# Altium PCB Encoder Unit.PcbDoc
Units mm, origin at the board's own origin, x right, y up, seen from the top; angles counter-clockwise.
Board outline 34 x 27 mm, 2 copper layers (Top Layer, Bottom Layer); 16 components, 10 nets, 43 pads, 9 vias.
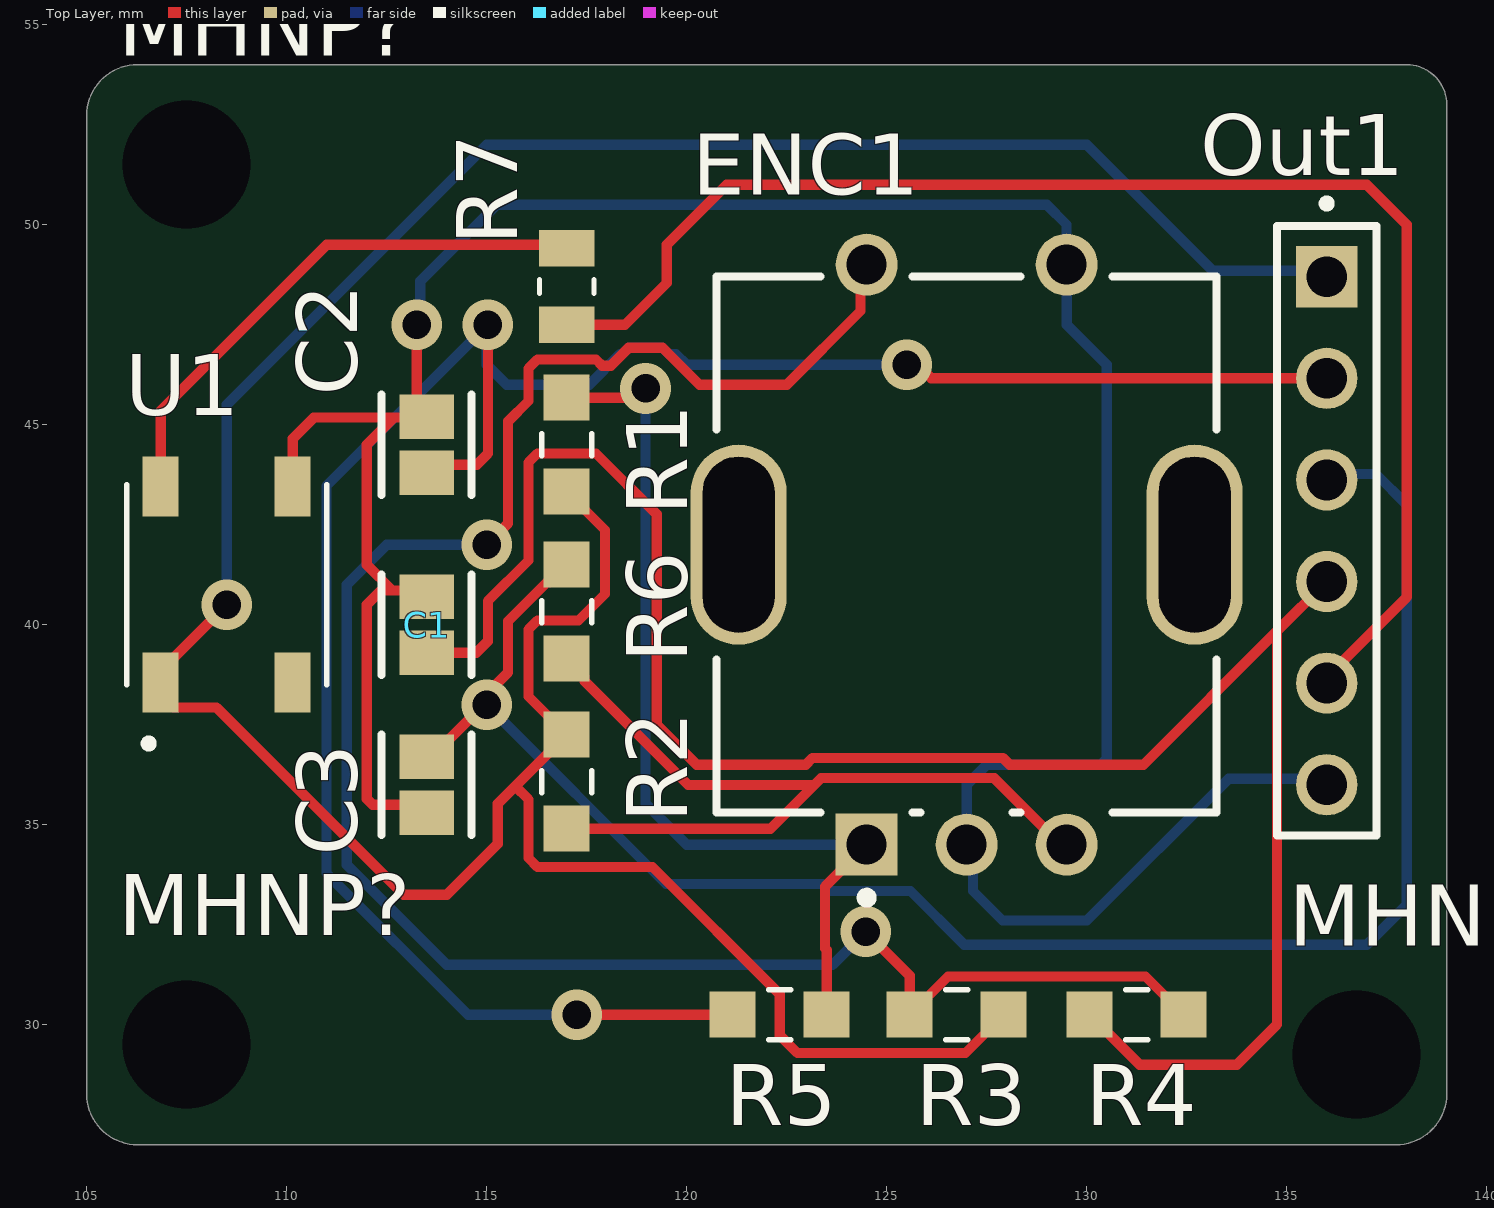
[diagram p0: Top Layer view]
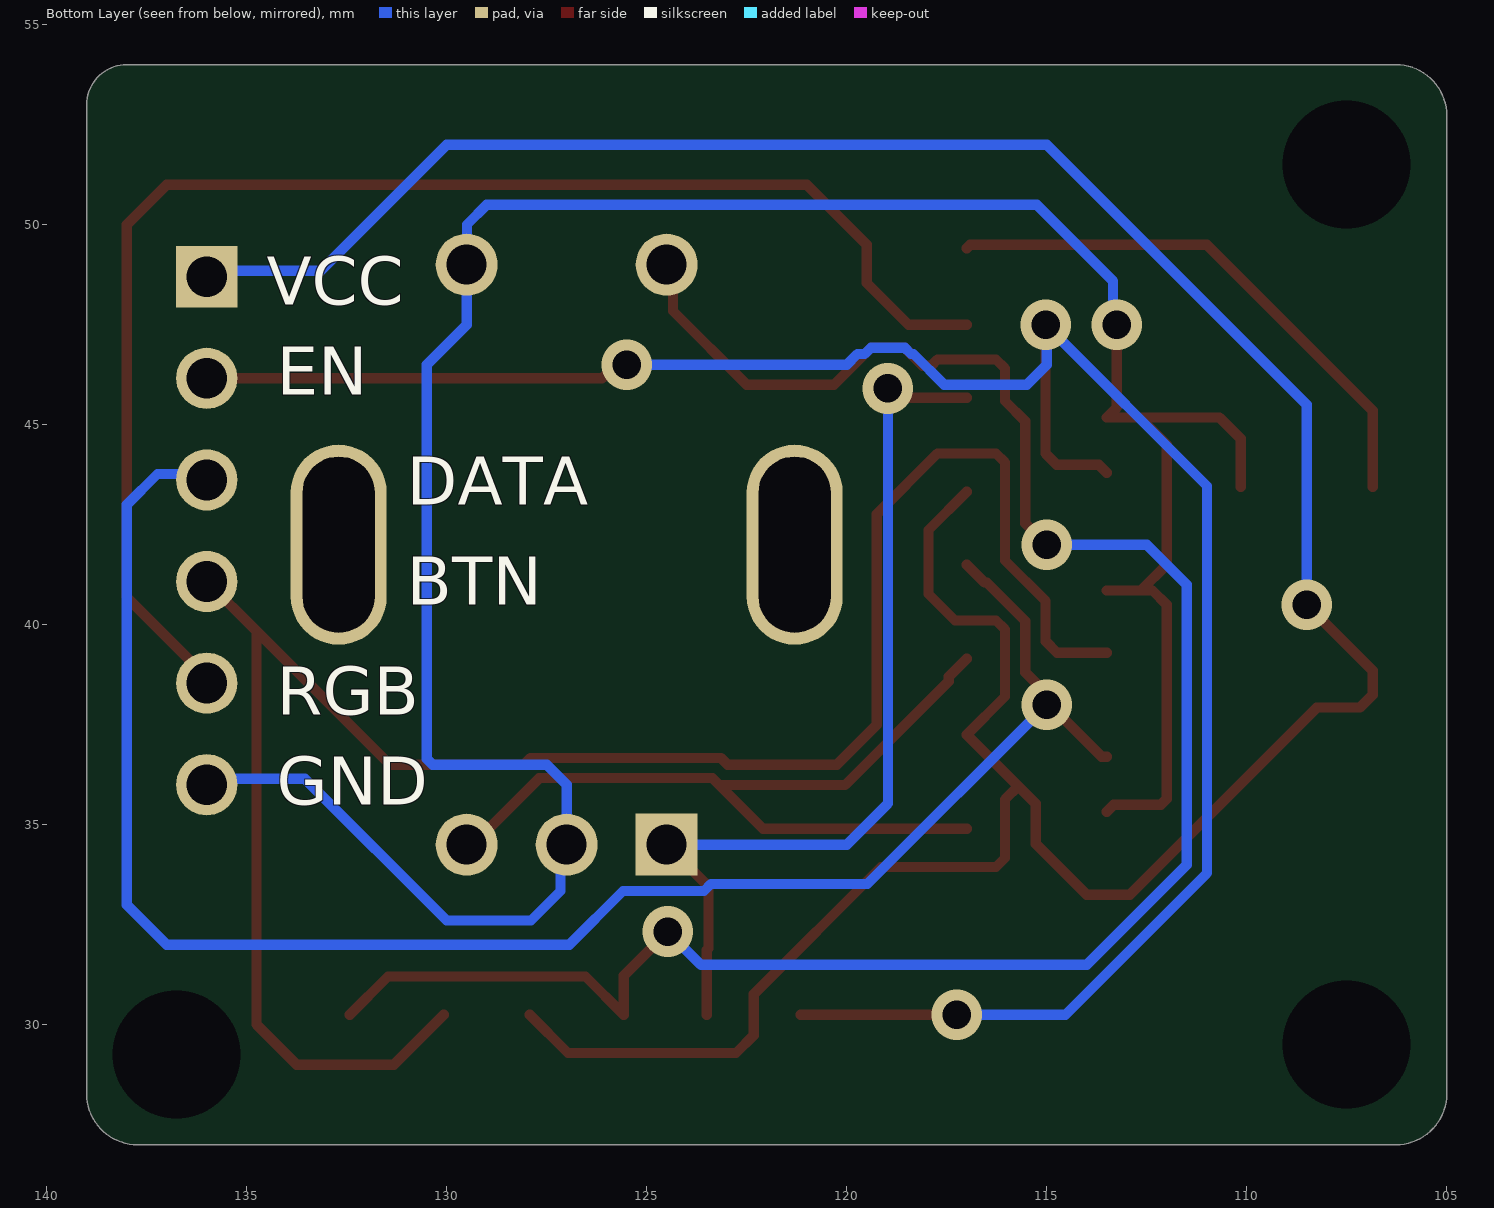
[diagram p1: Bottom Layer view, seen from below]
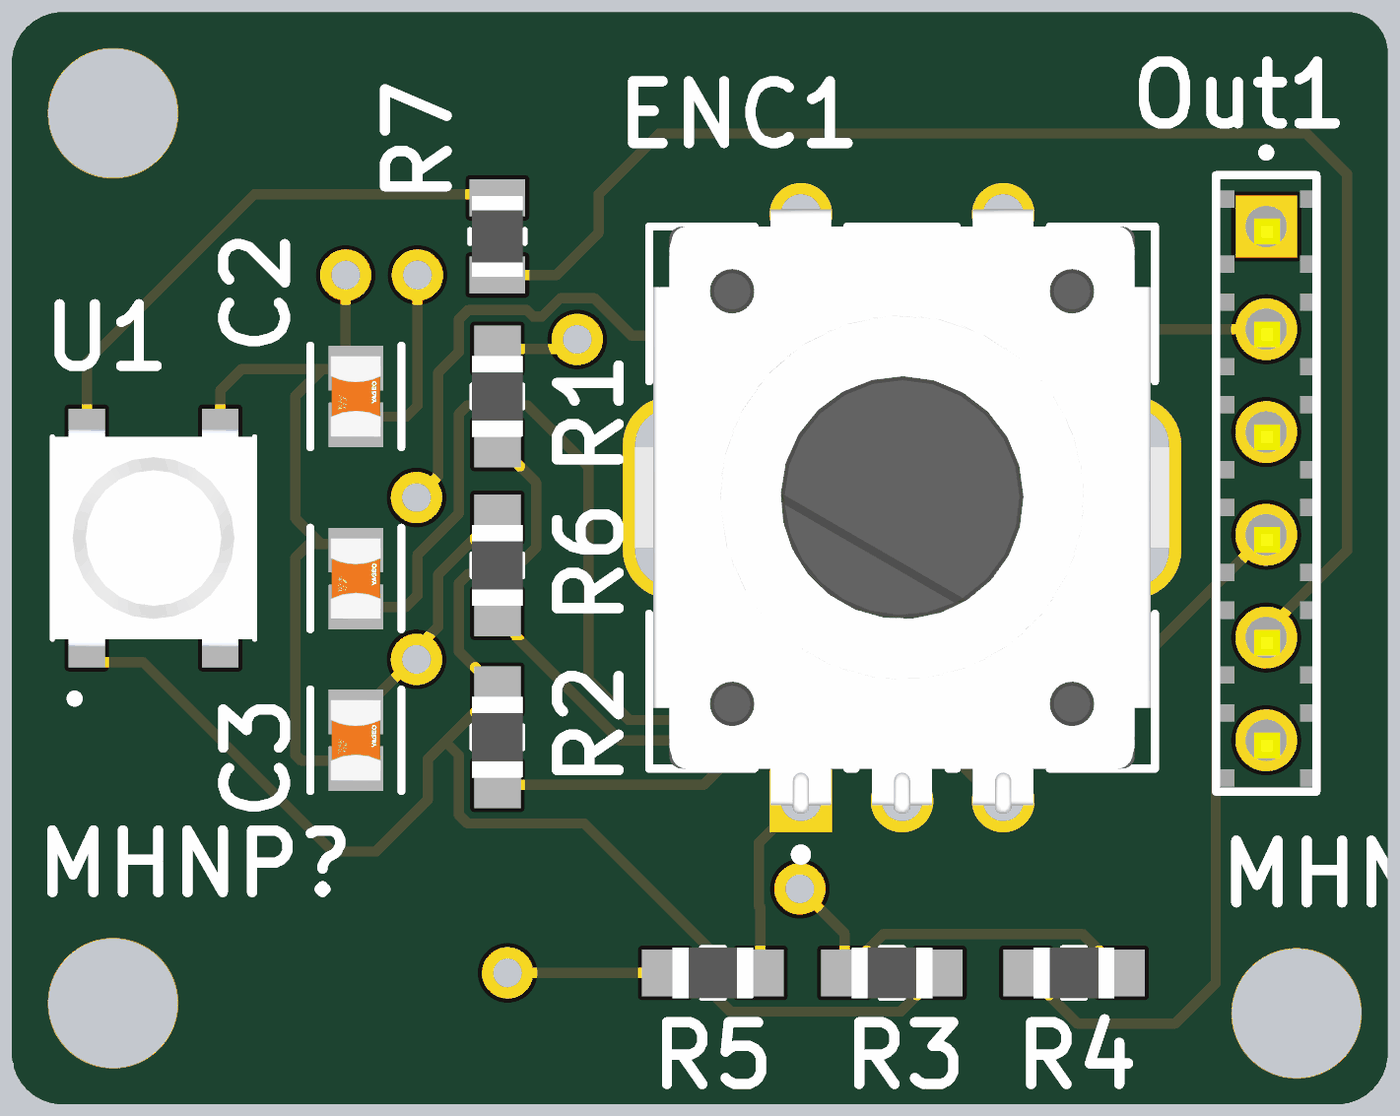
[diagram p2: 3D render of the assembled board from above, using the file's embedded part models]

## Layer stack, top to bottom
Top Solder: solder mask 0.0102, Solder Resist, Dk 3.5
Top Layer: signal copper 0.0356
Dielectric 1: dielectric 0.32, FR-4, Dk 4.8
Bottom Layer: signal copper 0.0356
Bottom Solder: solder mask 0.0102, Solder Resist, Dk 3.5

## Board outline
105,28.27 ccw(c106.27,28.27) 106.27,27 137.73,27 ccw(c137.73,28.27) 139,28.27 139,53 ccw(c138,53) 138,54 106.27,54 ccw(c106.27,52.73) 105,52.73

## Design rules (kind name [scope] priority, off if disabled: settings)
Clearance [All] p1: gap=0.254 ignorepadtopadclearanceinfootprint=FALSE
HoleSize [All] p1: absolutevalues=TRUE maxlimit=5 minlimit=0.025 maxpercent=80.000 minpercent=20.000
PolygonConnect [All] p1: connectstyle=Relief reliefconductorwidth=0.254 reliefentries=4 polygonreliefangle="90 Angle" airgapwidth=0.254
RoutingVias [All] p1: holewidth=0.711 width=1.27 viastyle="Through Hole" minholewidth=0.711 minwidth=1.27 maxholewidth=0.711 maxwidth=1.27
SolderMaskExpansion [All] p1: expansion=0.102 istentingtop=FALSE
SupplyNets "Schematic Supply Nets_1" [InNet('VCC')] p1: voltage=0.000
SupplyNets "Schematic Supply Nets" [InNet('GND')] p2: voltage=0.000
Width [All] p1: maxlimit=0.3 minlimit=0.254 preferedwidth=0.3
29 further rules are at their usual default settings.

## Components (designator, comment, footprint, x,y, rotation, side; value= is the part's Value field where it differs from the comment)
C1 "CC0805KRX7R9BB104" FP-CC0805-0_85-IPC_C 113.5,40 r90 top value="100 nF"
C2 "CC0805KRX7R9BB104" FP-CC0805-0_85-IPC_C 113.5,44.5 r90 top value="100 nF"
C3 "CC0805KRX7R9BB104" FP-CC0805-0_85-IPC_C 113.5,36 r90 top value="100 nF"
ENC1 "PEC11R-4215F-S0024" FP-PEC11R-4215F-S0024-MFG 127,42 r0 top
MHNP? "Mounting Hole Non plated 3.2mm" MTHNP3P2MM 107.5,51.5 r90 top
MHNP? "Mounting Hole Non plated 3.2mm" MTHNP3P2MM 107.5,29.5 r90 top
MHNP? "Mounting Hole Non plated 3.2mm" MTHNP3P2MM 136.75,29.25 r90 top
Out1 "HMTSW-106-X-X-S-X" SAMTEC_HMTSW-106-X-X-S-X 136,42.35 r90 top
R1 "ERJ6RBD1002V" RES_ERJ6RBD1002V 117,44.5 r270 top
R2 "ERJ6RBD1002V" RES_ERJ6RBD1002V 117,36.075 r90 top
R3 "ERJ6RBD1002V" RES_ERJ6RBD1002V 126.75,30.25 r0 top
R4 "ERJ6RBD1001V" RES_ERJ6RBD1001V 131.25,30.25 r0 top
R5 "ERJ6RBD1001V" RES_ERJ6RBD1001V 122.325,30.25 r180 top
R6 "ERJ6RBD1001V" RES_ERJ6RBD1001V 117,40.325 r90 top
R7 "RC0805FR-07220RL" RESC2012X60N 117,48.455 r90 top
U1 "WS2812B-B" LED_WS2812B-B 108.5,41 r90 top

## Footprints (in the part's own frame and the unit in brackets; to place one, negate y for a bottom-side part, rotate by r counter-clockwise, add the part's x,y. Pads: shape width x height; smd on the part's side, far side on the other; paste and mask are expansions set on the pad)
FP-CC0805-0_85-IPC_C [mm]
  rect 1.105x1.356 smd paste+0 mask+0: 1(-0.701,0) 2(0.701,0)
  silkscreen extent -1.25,-1.12 1.25,1.12, body extent -1.35,-0.82 1.35,0.82, height 0.25
FP-PEC11R-4215F-S0024-MFG [mm]
  round 1.55 hole 1 paste-2539.97 mask+0: 1(-2.5,7) 2(2.5,7) B(2.5,-7.5) C(0,-7.5)
  rrect100% 2.4x5 hole 4.4 slot 1.8 at 0 deg paste-2539.97 mask+0: 3(-5.7,0) 4(5.7,0)
  rect 1.55x1.55 hole 1 paste-2539.97 mask+0: A(-2.5,-7.5)
  silkscreen extent -6.25,-8.95 6.25,6.7, body extent -7,-8.37 7,7.88, height 0.25
LED_WS2812B-B [mm]
  rect 1.5x0.9 smd: 1(-2.45,1.65) 2(-2.45,-1.65) 3(2.45,-1.65) 4(2.45,1.65)
  silkscreen extent -4.07,-2.5 2.5,2.5, body extent -2.7,-2.5 2.7,2.5, height 1.62
MTHNP3P2MM [mm] "Mounting Hole Non plated 3.2mm"
  round 1 hole 3.2: ""(0,0)
RES_ERJ6RBD1001V [mm]
  rect 1.15x1.15 smd: 1(-1.175,0) 2(1.175,0)
  silkscreen extent -0.28,-0.63 0.28,0.63, body extent -1,-0.63 1,0.63, height 0.7
RES_ERJ6RBD1002V [mm]
  rect 1.15x1.15 smd: 1(-1.175,0) 2(1.175,0)
  silkscreen extent -0.28,-0.63 0.28,0.63, body extent -1,-0.63 1,0.63, height 0.7
RESC2012X60N [mm]
  rect 0.92x1.38 smd: 1(-0.955,0) 2(0.955,0)
  silkscreen extent -0.17,-0.68 0.17,0.68, body extent -1,-0.63 1,0.63, height 0.6
SAMTEC_HMTSW-106-X-X-S-X [mm]
  rect 1.53x1.53 / inner round 1.53 / far side rect 1.53x1.53 hole 1.02: 01(6.35,0)
  round 1.53 hole 1.02: 02(3.81,0) 03(1.27,0) 04(-1.27,0) 05(-3.81,0) 06(-6.35,0)
  silkscreen extent -7.62,-1.24 8.28,1.24, body extent -7.75,-1.27 7.49,1.22, height 2.54

## Part data
C1 C2 C3: library part CMP-2100-03606-3, "CAP CER 0.1UF 50V X7R 0805", Capacitance="100 nF", Manufacturer=Yageo, Package=CC0805-0.85, Temperature="-30°C to +85°C", Temperature Characteristic=X7R, Temperature Range High=+85°C, Temperature Range Low=-30°C, Tolerance=0.1, Voltage Rating="50 V", Automotive=No, Category=Cap, ComponentLink2Description=Datasheet, ComponentLink2URL=http://www.yageo.com/documents/recent/UPY-GPHC_Y5V_6.3V-to-50V_8.pdf, Device Class L1="Passive Components", Device Class L2=Capacitors, Device Class L3="Ceramic Capacitors", Digikey Description="CAP CER 0.1UF 50V X7R 0805", Footprint Url=http://www.yageo.com/exep/pages/download/literatures/UPY-C_GEN_24.pdf, Height=0.95mm, Ipc Land Pattern Name=CAPC200125X85, Lead Free=Yes, Manufacturer Part Number=CC0805KRX7R9BB104, Material=Ceramic, Mouser Description="Multilayer Ceramic Capacitors MLCC - SMD/SMT 100nF 50V X7R 10%", Octopart=https://octopart.com/cc0805krx7r9bb104-yageo-192993, RoHS=TRUE
ENC1: library part CMP-1747-00012-2, "ROTARY ENCODER MECHANICAL 24PPR", LCSC Part Number=C143790, Max Operating Temperature=70°C, Min Operating Temperature=-30°C, Package Quantity=150, Built in Switch=Yes, Detent=Yes, Encoder Type=Mechanical, Height=13.4mm, Hole Diameter=1.8mm, Length=21.5mm, Mount="Through Hole", Number of Channels=2, Orientation=Vertical, Output Type=Quadrature, Packaging=Bulk, Pulses per Revolution=24, Radiation Hardening=No, REACH SVHC="No SVHC", RoHS Compliant=Yes, Series=PEC11R, Termination="PC Pins", Type=Mechanical, Width=12.5mm
MHNP? MHNP? MHNP?: library part MTHNP3P2MM
Out1: ".100 High-Temp Variable Post Height Terminal Strip", LCSC Part Number=C3334125, Package=None, Check_prices=https://www.snapeda.com/parts/HMTSW-106-07-T-S-200/Samtec/view-part/?ref=eda, MF=SAMTEC, MP=HMTSW-106-07-T-S-200, SnapEDA_Link=https://www.snapeda.com/parts/HMTSW-106-07-T-S-200/Samtec/view-part/?ref=snap
R1 R2 R3: "Precision Thick Film Surface Mnt Resistor 0805 10kOhm +/-0.5% 0.1W +/-50ppm/degC", Package="805-2 Panasonic", Check_prices=https://www.snapeda.com/parts/ERJ6RBD1002V/Panasonic/view-part/?ref=eda, MF=Panasonic, MP=ERJ6RBD1002V, SnapEDA_Link=https://www.snapeda.com/parts/ERJ6RBD1002V/Panasonic/view-part/?ref=snap
R4 R5 R6: "Precision Thick Film Surface Mnt Resistor 0805 1kOhm +/-0.5% 0.1W +/-50ppm/degC", Package="805-2 Panasonic", Check_prices=https://www.snapeda.com/parts/ERJ6RBD1001V/Panasonic/view-part/?ref=eda, MF=Panasonic, MP=ERJ6RBD1001V, SnapEDA_Link=https://www.snapeda.com/parts/ERJ6RBD1001V/Panasonic/view-part/?ref=snap
R7: "220 Ohm Â±1% 0,125W, 1/8W Ã‡ip Direnci 0805 (2012 Metrik) Nem DirenÃ§li KalÄ±n Film", Package="2012 Yageo", Check_prices=https://www.snapeda.com/parts/RC0805FR-07220RL/Yageo/view-part/?ref=eda, MF=Yageo, MP=RC0805FR-07220RL, SnapEDA_Link=https://www.snapeda.com/parts/RC0805FR-07220RL/Yageo/view-part/?ref=snap
U1: "Intelligent control LED integrated light source", LCSC Part Number=C114586, Package=None, Availability=Unavailable, MP=WS2812B-B, Price=None

## Free pads (board coordinates)
  round 3.2 on Mech1: 2(107.5,29.5) 3(107.5,51.5) 4(136.75,29.25)

## Via types
v1: diameter 1.27, hole 0.711, Top Layer to Bottom Layer, 9 vias

## Nets (pads, with @x,y where several pads share a name; then routed paths per layer and width w, separated by ;. In a path a pad name is that pad's centre, name@x,y a point inside that pad or via, vN(x,y) a via of type N, cw(c..) or ccw(c..) an arc to the next point about the centre after c; other vN are vias at no path point)
BTN: C1.1 Out1.04 R4.1 | length 50.4
  Top Layer w0.254: C1.1 114.742,39.299 115.028,39.585 115.028,40.591 116.044,41.607 116.044,44.058 116.267,44.281 117.733,44.281 119.25,42.764 119.25,37.5 120.25,36.5 122.974,36.5 123.146,36.672 127.9,36.672 128.072,36.5 131.42,36.5 134.753,39.833 ; R4.1 131.325,29 133.75,29 134.753,30.003 134.753,39.833 ; Out1.04 134.753,39.833
DATA-CLK: C3.2 Out1.03 R6.2 | length 44.8
  Top Layer w0.254: C3.2 113.626,36.701 114.925,38 v1(115,38) 115,38.275 115.536,38.811 115.536,40.093 116.495,41.052 116.552,41.052 R6.2 ; Out1.03@136,43.77 Out1.03@136.135,43.635
  Bottom Layer w0.254: v1(115,38) 119.484,33.516 123.395,33.516 123.567,33.344 125.593,33.344 126.937,32 137,32 138,33 138,43 137.23,43.77 Out1.03@136,43.77
EN-CLK: C2.1 Out1.02 R5.2 | length 54.9
  Top Layer w0.254: C2.1 113.701,44 114.75,44 115.028,44.278 115.028,47.496 v1(115.024,47.5) ; v1(117.25,30.25) R5.2 ; v1(125.5,46.5) 125.775,46.5 126.115,46.16 Out1.02
  Bottom Layer w0.254: v1@115,47.5 115,46.5 115.5,46 117.563,46 118.329,46.766 118.392,46.766 118.551,46.925 119.393,46.925 119.552,46.766 119.734,46.766 120,46.5 v1(125.5,46.5) ; v1(115.024,47.5) 110.992,43.468 110.992,33.79 114.532,30.25 v1(117.25,30.25)
GND: C1.2 C2.2 C3.1 ENC1.2 ENC1.C Out1.06 U1.3 | length 69.4
  Top Layer w0.254: U1.3 110.15,44.65 110.677,45.177 112.677,45.177 ; v1(113.25,47.5) 113.25,45.427 113.5,45.177 112.677,45.177 ; C3.1@113.5,35.323 113.323,35.5 112.149,35.5 112,35.649 112,40.5 112.354,40.854 112.646,40.854 ; C1.2@113.5,40.854 112.646,40.854 ; 112.646,40.854 112,41.5 112,44.5 112.677,45.177
  Bottom Layer w0.254: v1(113.25,47.5) 113.339,47.589 113.339,48.589 115.25,50.5 129,50.5 129.493,50.007 129.493,49.007 ENC1.2 129.5,47.5 130.5,46.5 130.5,36.649 130.351,36.5 127.5,36.5 127,36 ENC1.C 127.156,34.344 127.156,33.344 127.895,32.605 130.002,32.605 133.547,36.15 Out1.06@136,36.15
NetENC1_1: ENC1.1 R3.1 R4.2 | length 51.3
  Top Layer w0.254: v1(115,42) 115.536,42.536 115.536,45.085 116.044,45.593 116.044,46.408 116.267,46.631 117.733,46.631 117.89,46.474 118.1,46.474 118.551,46.925 119.393,46.925 120.318,46 122.5,46 124.344,47.844 124.344,48.844 ENC1.1 ; v1(124.475,32.328) 125.575,31.228 R3.1 126.531,31.206 131.469,31.206 R4.2
  Bottom Layer w0.254: v1(115,42) 112.5,42 111.5,41 111.5,34 114,31.5 123.647,31.5 v1(124.475,32.328)
NetENC1_A: ENC1.A R1.1 R5.1 | length 23.1
  Top Layer w0.254: R1.1 118.463,45.675 118.697,45.909 v1(118.972,45.909) ; R5.1 123.5,31.866 123.459,31.907 123.459,33.459 ENC1.A
  Bottom Layer w0.254: v1(118.972,45.909) 118.972,35.528 120,34.5 ENC1.A
NetENC1_B: ENC1.B R2.1 R6.1 | length 21.5
  Top Layer w0.254: R2.1 122.093,34.9 123.357,36.164 ; R6.1 117.448,38.702 117.448,38.584 120.04,35.992 123.185,35.992 123.357,36.164 ; ENC1.B 129.353,34.5 127.689,36.164 123.357,36.164
NetR7_2: R7.2 U1.4 | length 13.8
  Top Layer w0.254: U1.4 106.85,45.35 111,49.5 116.91,49.5 R7.2
RGB: Out1.05 R7.1 | length 35.6
  Top Layer w0.254: R7.1 118.455,47.5 119.5,48.545 119.5,49.5 121,51 133,51 137,51 138,50 138,40.69 Out1.05@136,38.69
VCC: Out1.01 R1.2 R2.2 R3.2 U1.1 | length 79
  Top Layer w0.254: v1(108.5,40.5) 106.85,38.85 U1.1 106.85,38.25 107.173,37.927 108.248,37.927 112.925,33.25 114,33.25 115.276,34.526 115.276,35.526 115.713,35.963 ; R1.2 117.956,42.369 117.956,40.767 117.295,40.106 116.267,40.106 116.044,39.883 116.044,38.206 R2.2 115.713,35.963 ; R3.2 126.969,29.294 122.767,29.294 122.325,29.736 122.325,30.764 119.145,33.944 116.267,33.944 116.044,34.167 116.044,35.633 115.713,35.963
  Bottom Layer w0.254: v1(108.5,40.5) 108.5,45.5 115,52 130,52 133.15,48.85 Out1.01@136,48.85
pads on no net: ENC1.3 ENC1.4 MHNP?. U1.2

## Silkscreen, mask and mechanical layers (free items; w line width, h text height)
Bottom Overlay:
  text "VCC" at 134.496,48.004 h1.2
  text "EN" at 134.246,45.754 h1.2
  text "DATA" at 130.996,43.004 h1.2
  text "BTN" at 130.996,40.504 h1.2
  text "RGB" at 134.246,37.754 h1.2
  text "GND" at 134.246,35.504 h1.2
Mechanical 1:
  the board outline again, w0.254